# EAGLE board encoder (EAGLE 6.0)
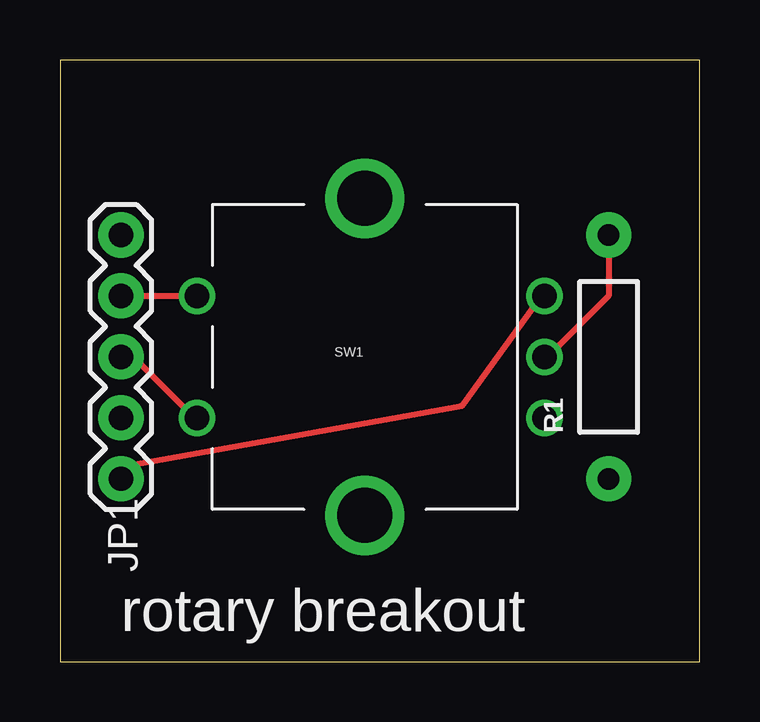
[diagram p0: board, top side]
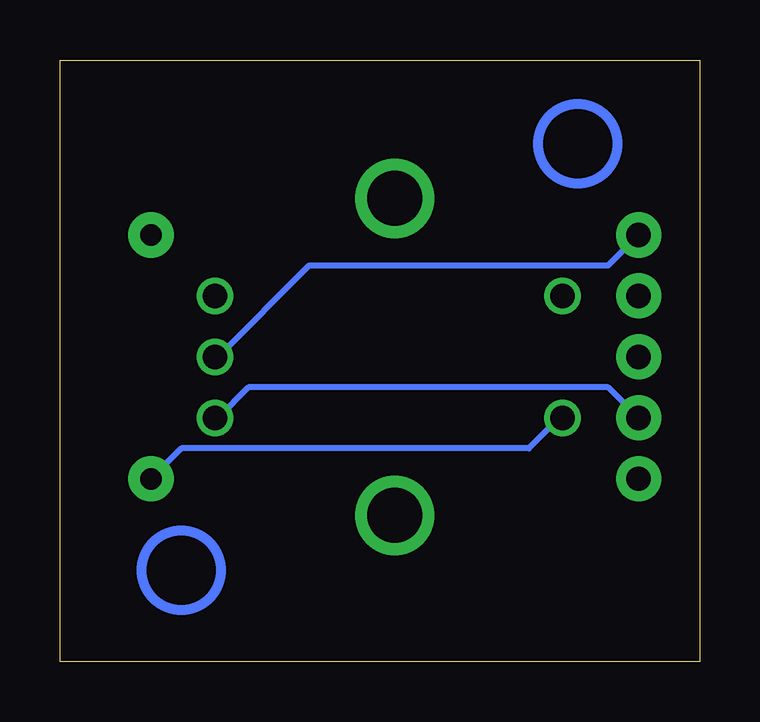
[diagram p1: board, bottom side, seen from below]

Size 26.65 x 25.07 mm. Coordinates in mm from the lower left corner, seen from the top.
Outline: 0,0 26.65,0 26.65,25.07 0,25.07 0,0
Copper layers (1*16): Top 0.035mm / dielectric 1.5mm / Bottom 0.035mm
Design rules: minimum track width 10mil, minimum drill 24mil, track to track 8mil, track to pad 8mil, pad to pad 8mil, via to via 8mil, smd to smd 8mil, copper to edge 40mil, drill to drill 8mil, minimum pad ring 10mil, minimum via ring 8mil, stop-mask expansion 4mil, vias tented up to drill 0mil, thermal gap 10mil

## Footprints (pad centres in the part's own frame; a part is rotated, then mirrored left to right if it is on the bottom)
1X05 = drill 1.016 pad 1.88: 1 0,0; 2 2.54,0; 3 5.08,0; 4 7.62,0; 5 10.16,0
AXIAL-0.4 = drill 0.9 pad 1.88: P$1 -5.08,0; P$2 5.08,0
ROTARY_ENC_PLAIN = drill 1.016: A 7.493,-2.54; B 7.493,2.54; C 7.493,0; SW+ -6.985,2.54; SW- -6.985,-2.54 | drill 2.286: P$3 0,6.604; P$4 0,-6.604

## Placement (x,y rotation side)
JP1  [1X05]  2.54,7.62 90 top
R1  [AXIAL-0.4]  22.86,12.7 90 top
SW1  ROTARTY_ENCODER  [ROTARY_ENC_PLAIN]  12.7,12.7 0 top

## Library data of the parts
JP1 = SparkFun-Connectors
R1 = SparkFun-Passives
SW1 = SparkFun-Electromechanical

## Nets
N$1: JP1.1 SW1.B
N$2: JP1.2 SW1.A
N$3: JP1.5 R1.P$2 SW1.C
N$4: JP1.3 R1.P$1 SW1.SW-
N$6: JP1.4 SW1.SW+

## Tracks (layer width: path | path; a pad name or v marks a point on that pad's centre or on a via)
N$1
  Top 0.254: JP1.1 2.54,8.13 16.76,10.67 20.07,15.24 SW1.B
N$2
  Bottom 0.254: JP1.2 3.81,11.43 18.8,11.43 20.07,10.16 SW1.A
N$3
  Top 0.254: R1.P$2 22.86,15.24 20.32,12.7 SW1.C
  Bottom 0.254: JP1.5 3.81,16.51 16.26,16.51 20.07,12.7 SW1.C
N$4
  Top 0.254: JP1.3 3.05,12.7 5.59,10.16 SW1.SW-
  Bottom 0.254: R1.P$1 21.59,8.89 7.11,8.89 5.84,10.16 SW1.SW-
N$6
  Top 0.254: JP1.4 SW1.SW+
(copper drawn outside any net)
  shapes: Bottom circle x2

## Text on the board
tPlace: rotary breakout